# Altium PCB TQFP-32.PcbDoc
Units mil, origin at the board's own origin, x right, y up, seen from the top; angles counter-clockwise.
Board outline 1100 x 1100 mil, 2 copper layers (Top Layer, Bottom Layer); 5 components, 142 nets, 64 pads, 0 vias.
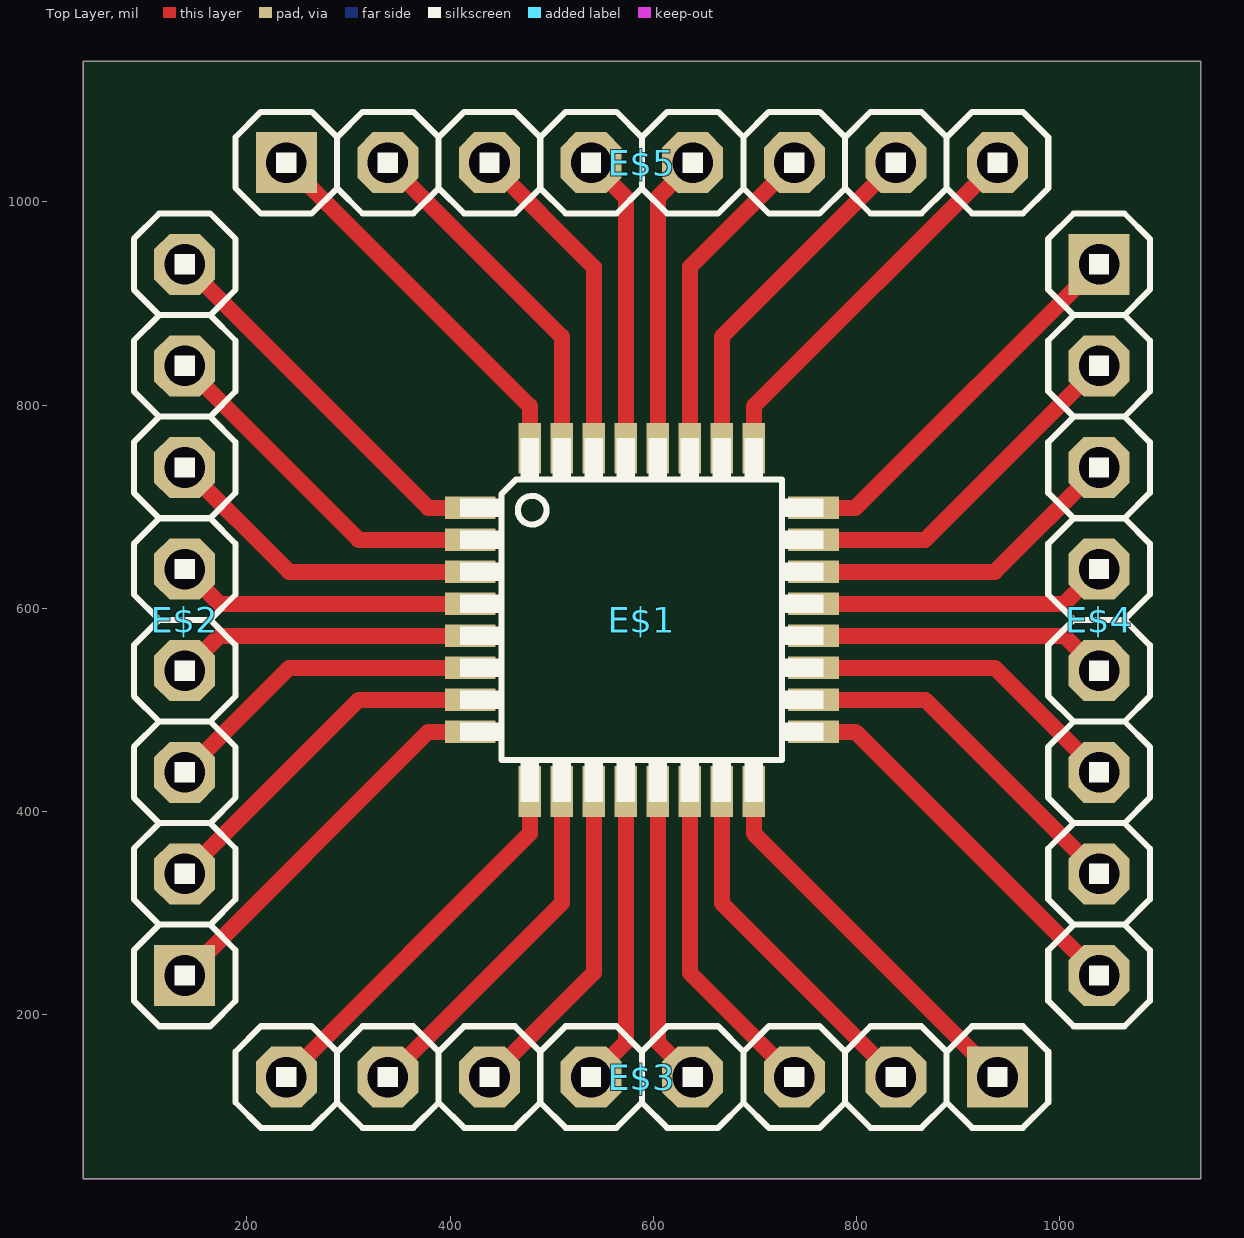
[diagram p0: Top Layer view]
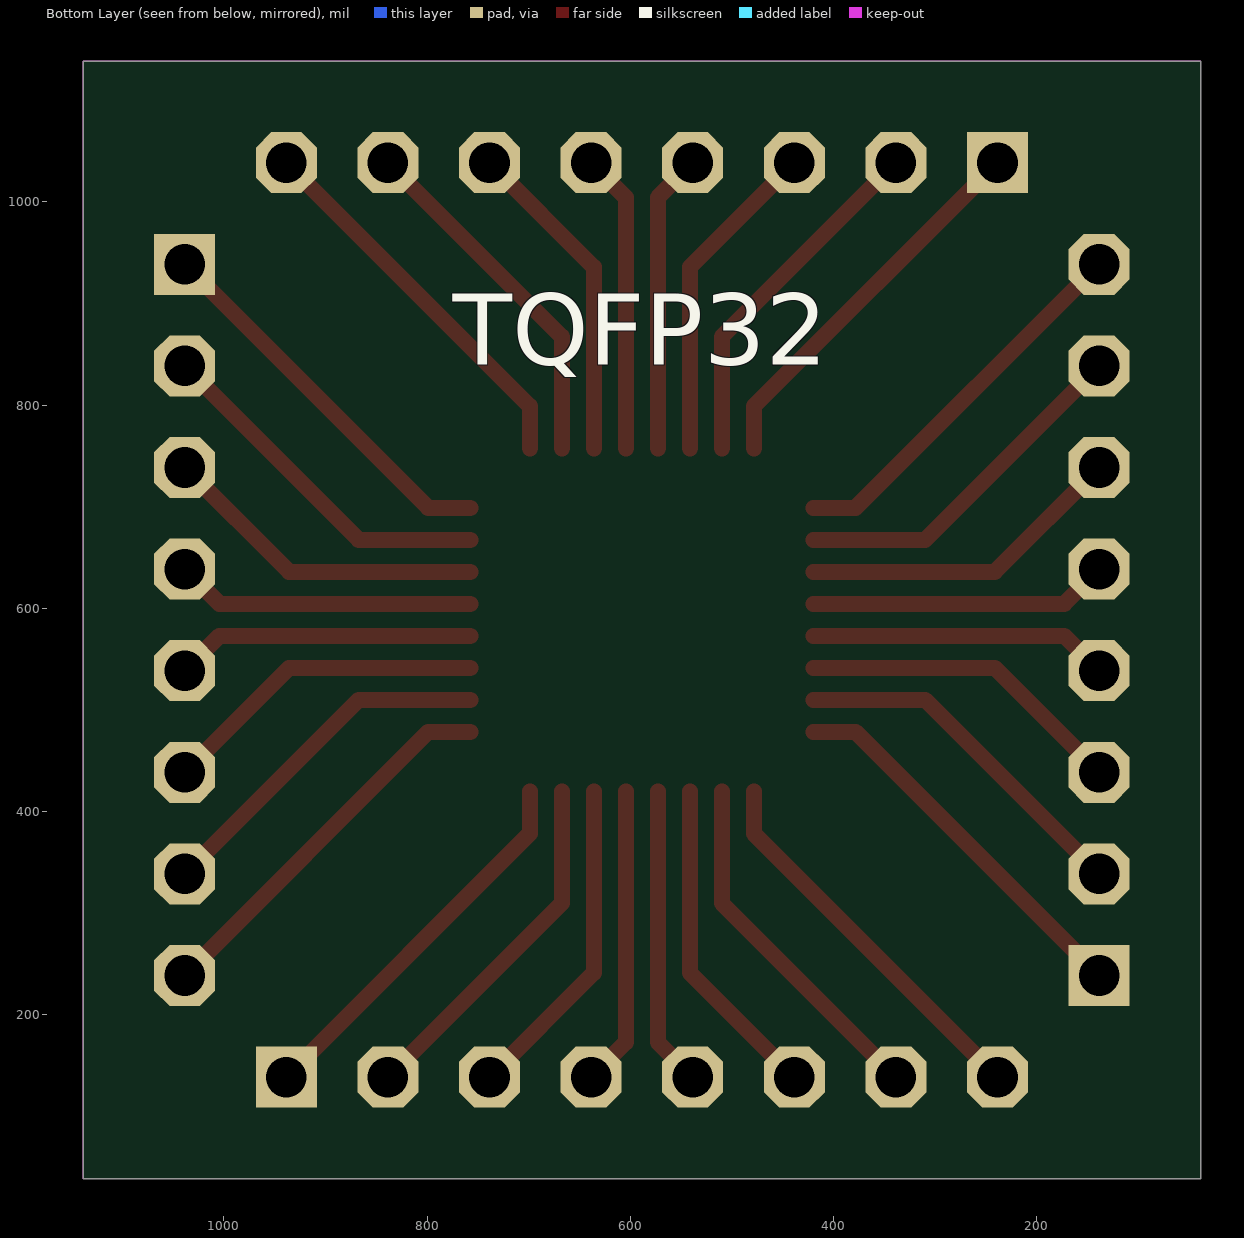
[diagram p1: Bottom Layer view, seen from below]

## Layer stack, top to bottom
Top Layer: signal copper 1.4
Dielectric: dielectric 12.6, FR-4, Dk 4.8
Bottom Layer: signal copper 1.4

## Board outline
38.67,1138.67 1138.67,1138.67 1138.67,38.67 38.67,38.67

## Design rules (kind name [scope] priority, off if disabled: settings)
Clearance [All] p1: gap=10
PolygonConnect [All] p1: connectstyle=Relief reliefconductorwidth=10 reliefentries=4 polygonreliefangle="90 Angle"
RoutingVias [All] p1: holewidth=28 width=50 viastyle="Through Hole" minholewidth=28 minwidth=50 maxholewidth=28 maxwidth=50
SilkscreenOverComponentPads [All] p1: minsilkscreentomaskgap=10
SolderMaskExpansion [All] p1: expansion=4
Width [All] p1: maxlimit=10 minlimit=10 preferedwidth=10
27 further rules are at their usual default settings.

## Components (designator, comment, footprint, x,y, rotation, side; value= is the part's Value field where it differs from the comment)
E$1 "Comment" TQFP32-08 588.67,588.67 r0 top
E$2 "Comment" 1X08-S 138.67,588.67 r90 top
E$3 "Comment" 1X08-S 588.67,138.67 r180 top
E$4 "Comment" 1X08-S 1038.67,588.67 r270 top
E$5 "Comment" 1X08-S 588.67,1038.67 r0 top

## Footprints (in the part's own frame and the unit in brackets; to place one, negate y for a bottom-side part, rotate by r counter-clockwise, add the part's x,y. Pads: shape width x height; smd on the part's side, far side on the other; paste and mask are expansions set on the pad)
1X08-S [mil]
  rect 60x60 hole 40: 1(-350,0)
  oct 60x60 hole 40: 2(-250,0) 3(-150,0) 4(-50,0) 5(50,0) 6(150,0) 7(250,0) 8(350,0)
  silkscreen extent -400,-50 400,50
TQFP32-08 [mil]
  rect 50x22 smd: 1(-169,110.24) 2(-169,78.74) 3(-169,47.24) 4(-169,15.75) 5(-169,-15.75) 6(-169,-47.25) 7(-169,-78.74) 8(-169,-110.24) 17(169,-110.24) 18(169,-78.74) 19(169,-47.25) 20(169,-15.75) 21(169,15.75) 22(169,47.24) 23(169,78.74) 24(169,110.24)
  rect 22x50 smd: 9(-110.24,-169) 10(-78.74,-169) 11(-47.25,-169) 12(-15.75,-169) 13(15.75,-169) 14(47.24,-169) 15(78.74,-169) 16(110.24,-169) 25(110.24,169) 26(78.74,169) 27(47.24,169) 28(15.75,169) 29(-15.75,169) 30(-47.25,169) 31(-78.74,169) 32(-110.24,169)
  silkscreen extent -179,-179 179,179

## Nets (pads, with @x,y where several pads share a name; then routed paths per layer and width w, separated by ;. In a path a pad name is that pad's centre, name@x,y a point inside that pad or via, vN(x,y) a via of type N, cw(c..) or ccw(c..) an arc to the next point about the centre after c; other vN are vias at no path point)
N$1: 
N$2: 
N$3: 
N$4: 
N$5: 
N$6: 
N$7: 
N$8: 
N$9: 
N$10: 
N$11: 
N$12: 
N$13: 
N$14: 
N$15: 
N$16: 
N$17: 
N$18: 
N$19: 
N$20: 
N$21: 
N$22: 
N$23: 
N$24: 
N$25: 
N$26: 
N$27: 
N$28: 
N$29: 
N$30: 
N$31: 
N$32: 
N$33: 
N$34: 
N$35: 
N$36: 
N$37: 
N$38: 
N$39: 
N$40: 
N$41: 
N$42: 
N$43: 
N$44: 
S$1: E$1.1 E$2.8 | length 380.3
  Top Layer w16: E$2.8 378.43,698.9 E$1.1
S$2: E$1.2 E$2.7 | length 351.9
  Top Layer w16: E$2.7 309.93,667.41 E$1.2
S$3: E$1.3 E$2.6 | length 323.6
  Top Layer w16: E$2.6 241.42,635.91 E$1.3
S$4: E$1.4 E$2.5 | length 295.2
  Top Layer w16: E$2.5 172.92,604.41 E$1.4
S$5: E$1.5 E$2.4 | length 295.2
  Top Layer w16: E$2.4 172.92,572.92 E$1.5
S$6: E$1.6 E$2.3 | length 323.6
  Top Layer w16: E$2.3 241.42,541.42 E$1.6
S$7: E$1.7 E$2.2 | length 351.9
  Top Layer w16: E$2.2 309.93,509.93 E$1.7
S$8: E$1.8 E$2.1 | length 380.3
  Top Layer w16: E$2.1 378.43,478.43 E$1.8
S$9: E$1.9 E$3.8 | length 380.3
  Top Layer w16: E$3.8 478.43,378.43 E$1.9
S$10: E$1.10 E$3.7 | length 351.9
  Top Layer w16: E$3.7 509.93,309.93 E$1.10
S$11: E$1.11 E$3.6 | length 323.6
  Top Layer w16: E$3.6 541.42,241.42 E$1.11
S$12: E$1.12 E$3.5 | length 295.2
  Top Layer w16: E$3.5 572.92,172.92 E$1.12
S$13: E$1.13 E$3.4 | length 295.2
  Top Layer w16: E$1.13 604.41,172.92 E$3.4
S$14: E$1.14 E$3.3 | length 323.6
  Top Layer w16: E$1.14 635.91,241.42 E$3.3
S$15: E$1.15 E$3.2 | length 351.9
  Top Layer w16: E$1.15 667.41,309.93 E$3.2
S$16: E$1.16 E$3.1 | length 380.3
  Top Layer w16: E$1.16 698.9,378.43 E$3.1
S$17: E$1.17 E$4.8 | length 380.3
  Top Layer w16: E$1.17 798.9,478.43 E$4.8
S$18: E$1.18 E$4.7 | length 351.9
  Top Layer w16: E$1.18 867.41,509.93 E$4.7
S$19: E$1.19 E$4.6 | length 323.6
  Top Layer w16: E$1.19 935.91,541.42 E$4.6
S$20: E$1.20 E$4.5 | length 295.2
  Top Layer w16: E$1.20 1004.41,572.92 E$4.5
S$21: E$1.21 E$4.4 | length 295.2
  Top Layer w16: E$1.21 1004.41,604.41 E$4.4
S$22: E$1.22 E$4.3 | length 323.6
  Top Layer w16: E$1.22 935.91,635.91 E$4.3
S$23: E$1.23 E$4.2 | length 351.9
  Top Layer w16: E$1.23 867.41,667.41 E$4.2
S$24: E$1.24 E$4.1 | length 380.3
  Top Layer w16: E$1.24 798.9,698.9 E$4.1
S$25: E$1.25 E$5.8 | length 380.3
  Top Layer w16: E$1.25 698.9,798.9 E$5.8
S$26: E$1.26 E$5.7 | length 351.9
  Top Layer w16: E$1.26 667.41,867.41 E$5.7
S$27: E$1.27 E$5.6 | length 323.6
  Top Layer w16: E$1.27 635.91,935.91 E$5.6
S$28: E$1.28 E$5.5 | length 295.2
  Top Layer w16: E$1.28 604.41,1004.41 E$5.5
S$29: E$1.29 E$5.4 | length 295.2
  Top Layer w16: E$5.4 572.92,1004.41 E$1.29
S$30: E$1.30 E$5.3 | length 323.6
  Top Layer w16: E$5.3 541.42,935.91 E$1.30
S$31: E$1.31 E$5.2 | length 351.9
  Top Layer w16: E$5.2 509.93,867.41 E$1.31
S$32: E$1.32 E$5.1 | length 380.3
  Top Layer w16: E$5.1 478.43,798.9 E$1.32
S$33: 
S$34: 
S$35: 
S$36: 
S$37: 
S$38: 
S$39: 
S$40: 
S$41: 
S$42: 
S$43: 
S$44: 
S$45: 
S$46: 
S$47: 
S$48: 
S$49: 
S$50: 
S$51: 
S$52: 
S$53: 
S$54: 
S$55: 
S$56: 
S$57: 
S$58: 
S$59: 
S$60: 
S$61: 
S$62: 
S$63: 
S$64: 
S$65: 
S$66: 
S$67: 
S$68: 
S$69: 
S$70: 
S$71: 
S$72: 
S$73: 
S$74: 
S$75: 
S$76: 
S$77: 
S$78: 
S$79: 
S$80: 
S$81: 
S$82: 
S$83: 
S$84: 
S$85: 
S$86: 
S$87: 
S$88: 
S$89: 
S$90: 
S$91: 
S$92: 
S$93: 
S$94: 
S$95: 
S$96: 
S$97: 
S$98: 

## Keep-outs
Keep-Out Layer:
  the board outline again, w0.31

## Silkscreen, mask and mechanical layers (free items; w line width, h text height)
Bottom Overlay:
  text "TQFP32" at 775,840 h70